# Altium PCB Mainboard.PcbDoc
Units mm, origin at the board's own origin, x right, y up, seen from the top; angles counter-clockwise.
Board outline 14 x 7 mm, 4 copper layers (Top Layer, Layer 1, Layer 2, Bottom Layer), stack 1.082 mm thick; 22 components, 17 nets, 92 pads, 21 vias.
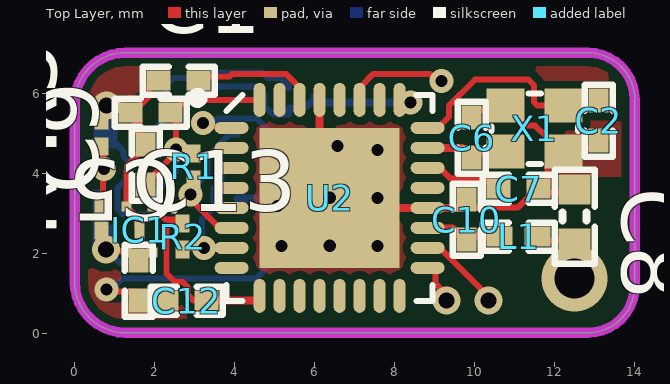
[diagram p0: Top Layer view]
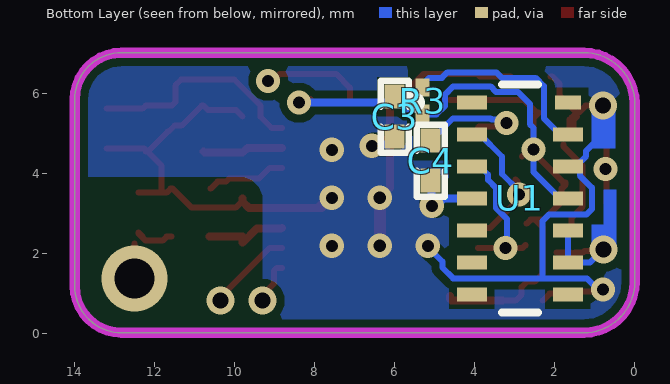
[diagram p1: Bottom Layer view, seen from below]
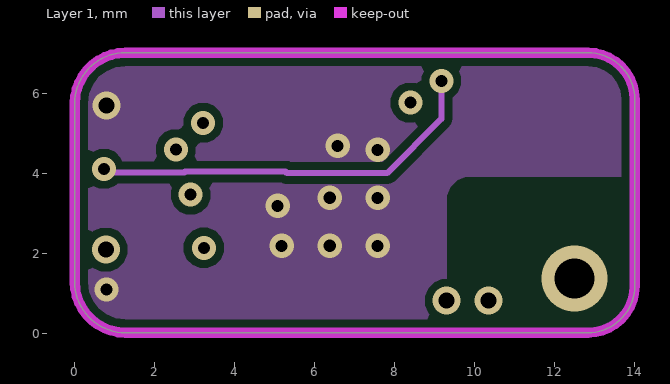
[diagram p2: Layer 1]
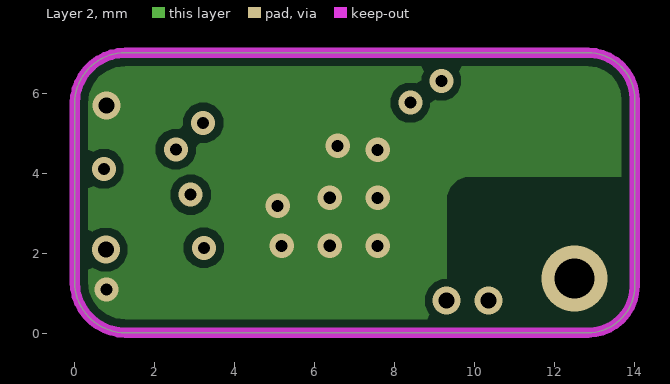
[diagram p3: Layer 2]
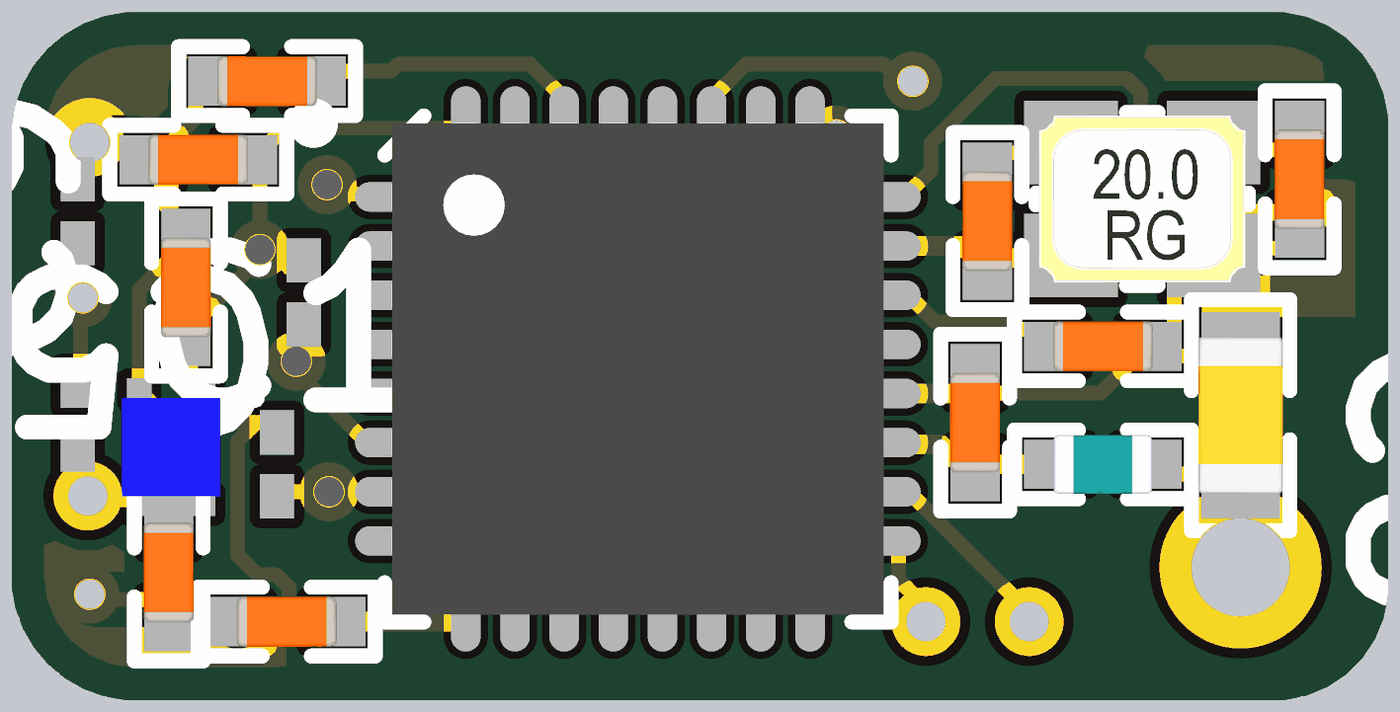
[diagram p4: 3D render of the assembled board from above, using the file's embedded part models]
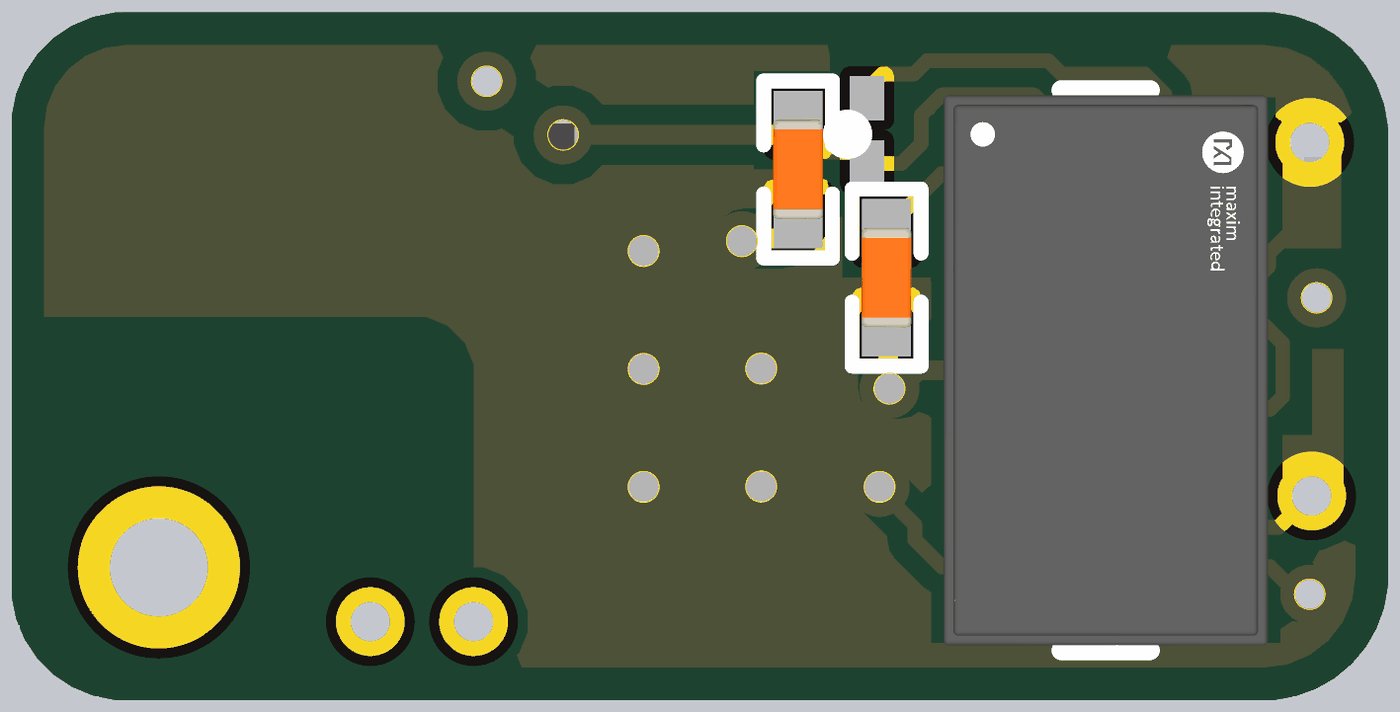
[diagram p5: 3D render of the assembled board from below, using the file's embedded part models]

## Layer stack, top to bottom
Top Solder: solder mask 0.0102, Solder Resist, Dk 3.5
Top Layer: signal copper 0.035
Dielectric 2: prepreg 0.0711, PP-006, Dk 4.1
Layer 1: signal copper 0.035
Dielectric 1: dielectric 0.8, FR-4, Dk 4.8
Layer 2: signal copper 0.035
Dielectric 3: prepreg 0.0711, PP-006, Dk 4.1
Bottom Layer: signal copper 0.035
Bottom Solder: solder mask 0.0102, Solder Resist, Dk 3.5

## Board outline
1.27,0.007 cw(c1.27,1.277) 0,1.277 0,5.737 cw(c1.27,5.737) 1.27,7.007 12.83,7.007 cw(c12.83,5.837) 14,5.837 14,1.177 cw(c12.83,1.177) 12.83,0.007

## Design rules (kind name [scope] priority, off if disabled: settings)
Clearance [All] p1: gap=0.2 ignorepadtopadclearanceinfootprint=FALSE except(0.127: SMDPad-SMDPad; 0.15: Arc-SMDPad Track-SMDPad; 0.33: Arc-THPad Track-THPad; 0.5: THPad-THPad Via-Hole)
ComponentClearance [All] p1: gap=0.254 collisioncheckmode=3 verticalgap=0 showdistances=FALSE
HoleSize [All] p1: absolutevalues=TRUE maxlimit=2.54 minlimit=0.25 maxpercent=80.000 minpercent=20.000
HoleToHoleClearance [All] p1: gap=0.5 allowstackedmicrovias=TRUE
MinimumAnnularRing [All] p1 off: minimumring=0.254
MinimumSolderMaskSliver [All] p1 off: minsoldermaskwidth=0.254
NetAntennae [All] p1: netantennaetolerance=10
PolygonConnect [All] p1: connectstyle=Direct reliefconductorwidth=0.254 reliefentries=4 polygonreliefangle="90 Angle" airgapwidth=0.254
RoutingVias [All] p1: holewidth=0.3 width=0.6 viastyle="Through Hole" minholewidth=0.2 minwidth=0.45 maxholewidth=1 maxwidth=2
SilkToSilkClearance [All] p1 off: silktosilkclearance=0.254
SilkToSolderMaskClearance [IsPad] p1 off: minsilkscreentomaskgap=0.15 clearancetoexposedcopper=TRUE
SolderMaskExpansion [All] p1: expansion=0.102 istentingtop=FALSE
UnRoutedNet [All] p1: checkbadconnections=TRUE
Width [All] p1: maxlimit=2 minlimit=0.15 preferedwidth=0.3
22 further rules are at their usual default settings.

## Components (designator, comment, footprint, x,y, rotation, side; value= is the part's Value field where it differs from the comment)
C1 "1.0µF" CAPC1005X04L 2.6,6.307 r0 top
C2 "12pF" CAPC1005X04L 13.1,5.307 r270 top
C3 "100nF" CAPC1005X04L 6,5.407 r270 bottom
C4 "100nF" CAPC1005X04L 5.1,4.307 r270 bottom
C5 "4.7µF" CAPC1005X04L 1.9,5.507 r180 top
C6 "12pF" CAPC1005X04L 9.925,4.882 r90 top
C7 "100pF" CAPC1005X04L 11.1,3.607 r0 top
C8 "tuning" CAPC1608X06L 12.5,2.907 r270 top
C9 "10µF" CAPC1005X04L 1.775,4.207 r90 top
C10 "0.8pF" CAPC1005X04L 9.8,2.832 r270 top
C12 "100nF" CAPC1005X04L 2.8,0.807 r180 top
C13 "10µF" CAPC1005X04L 1.6,1.307 r90 top
IC1 "TCR3UM18A,LF" TCR3UM18ALF 1.625,2.582 r270 top
L1 "3.9nH" INDC1005X04L 11.1,2.407 r0 top
R1 "4.7k" RESC0603X28X15NL05T05 2.975,4.157 r270 top
R2 "4.7k" RESC0603X28X15NL05T05 2.7,2.407 r90 top
R3 "4.7k" RESC0603X28X15NL05T05 5.3,5.807 r270 bottom
R4 "140k" RESC0603X28X15NL05T05 0.675,2.882 r90 top
R5 "100k" RESC0603X28X15NL05T05 0.675,4.982 r90 top
U1 "MAX30101EFD+" FP-F143A5-1-MFG 2.872,3.365 r180 bottom
U2 "nRF52810-QCAA" Nordic_QFN50P500X500X90-33N 6.371,3.378 r0 top
X1 "32MHz" BT-XTAL_2016 11.5,5.107 r0 top

## Footprints (in the part's own frame and the unit in brackets; to place one, negate y for a bottom-side part, rotate by r counter-clockwise, add the part's x,y. Pads: shape width x height; smd on the part's side, far side on the other; paste and mask are expansions set on the pad)
BT-XTAL_2016 [mm]
  rect 0.95x0.85 smd: 1(-0.725,-0.575) 2(0.725,-0.575) 3(0.725,0.575) 4(-0.725,0.575)
  silkscreen extent -1.08,-0.88 1.08,0.88, body extent -1.05,-0.85 1.05,0.85, height 0.56
CAPC1005X04L [mm]
  rect 0.6x0.5 smd: 1(-0.5,0) 2(0.5,0)
  silkscreen extent -0.9,-0.35 0.9,0.35, body extent -0.51,-0.25 0.51,0.25, height 0.5
CAPC1608X06L [mm]
  rect 0.75x0.8 smd: 1(-0.675,0) 2(0.675,0)
  silkscreen extent -1.17,-0.5 1.17,0.5, body extent -0.8,-0.43 0.8,0.43, height 0.8
FP-F143A5-1-MFG [mm]
  rect 0.75x0.35 smd paste+0 mask+0: 1(-1.2,2.4) 2(-1.2,1.6) 3(-1.2,0.8) 4(-1.2,0) 5(-1.2,-0.8) 6(-1.2,-1.6) 7(-1.2,-2.4) 8(1.2,-2.4) 9(1.2,-1.6) 10(1.2,-0.8) 11(1.2,0) 12(1.2,0.8) 13(1.2,1.6)
  rect 0.65x0.35 smd paste+0 mask+0: 14(1.2,2.4)
  silkscreen extent -2.75,-2.85 0.45,2.85, body extent -1.65,-2.8 1.65,2.8, height 1.65
INDC1005X04L [mm]
  rect 0.65x0.5 smd: 1(-0.475,0) 2(0.475,0)
  silkscreen extent -0.9,-0.35 0.9,0.35, body extent -0.5,-0.3 0.5,0.3, height 0.5
Nordic_QFN50P500X500X90-33N [mm]
  oval 0.85x0.3 smd mask+0.076: 1(-2.45,1.75) 2(-2.45,1.25) 3(-2.45,0.75) 4(-2.45,0.25) 5(-2.45,-0.25) 6(-2.45,-0.75) 7(-2.45,-1.25) 8(-2.45,-1.75) 17(2.45,-1.75) 18(2.45,-1.25) 19(2.45,-0.75) 20(2.45,-0.25) 21(2.45,0.25) 22(2.45,0.75) 23(2.45,1.25) 24(2.45,1.75)
  oval 0.3x0.85 smd mask+0.076: 9(-1.75,-2.45) 10(-1.25,-2.45) 11(-0.75,-2.45) 12(-0.25,-2.45) 13(0.25,-2.45) 14(0.75,-2.45) 15(1.25,-2.45) 16(1.75,-2.45) 25(1.75,2.45) 26(1.25,2.45) 27(0.75,2.45) 28(0.25,2.45) 29(-0.25,2.45) 30(-0.75,2.45) 31(-1.25,2.45) 32(-1.75,2.45)
  rect 3.5x3.5 smd: 33(0,0)
  silkscreen extent -3.42,-2.57 2.57,2.62, body extent -2.5,-2.5 2.5,2.5, height 0.9
RESC0603X28X15NL05T05 [mm] "Chip Resistor, 2-Leads, Body 0.60x0.30mm, IPC Medium Density"
  rect 0.45x0.35 smd: 1(-0.325,0) 2(0.325,0)
  body extent -0.33,-0.17 0.33,0.18, height 0.28
TCR3UM18ALF [mm]
  rect 0.25x0.25 smd: 1(-0.575,0.325) 2(-0.575,-0.325) 3(0.575,-0.325) 4(0.575,0.325)
  rect 0.45x0.25 smd: 5(0,0)
  silkscreen extent -0.55,0.8 -0.45,0.9, body extent -0.5,-0.5 0.5,0.5, height 0.58

## Part data
C1 C9 C13: library part C0603-1µ0, "Capacitor, X7R, ±10%", Footprint Doc=0603, LatestRevisionDate=2013-06-05, Note=16V, Part Number=C0603-1µ0, Pin Count=2, Published=2009-05-08, Publisher="Nordic Semiconductor"
C2 C6: library part C0402-12p, "Capacitor, NP0, ±2%", Footprint Doc=0402, LatestRevisionDate=2011-05-11, Note=50V, Part Number=C0402-12p, Pin Count=2, Published=2009-05-08, Publisher="Nordic Semiconductor"
C3 C4 C12: library part C0402-100n, "Capacitor, X7R, ±10%", Footprint Doc=0402, LatestRevisionDate=2009-11-23, Note=16V, Part Number=C0402-100n, Pin Count=2, Published=2009-05-08, Publisher="Nordic Semiconductor"
C5: library part C0603-4µ7, "Capacitor, X5R, ±10%", Footprint Doc=0603, LatestRevisionDate=2009-11-23, Note=6.3V, Part Number=C0603-4µ7, Pin Count=2, Published=2009-05-08, Publisher="Nordic Semiconductor"
C7: library part C0402-100p, "Capacitor, NP0, ±5%", Footprint Doc=0402, LatestRevisionDate=2009-05-08, Note=50V, Part Number=C0402-100p, Pin Count=2, Published=2009-05-08, Publisher="Nordic Semiconductor"
C8 C10: library part C0402-0.8p, "Capacitor, NP0, ±5%", Footprint Doc=0402, LatestRevisionDate=2012-11-21, Note=50V, Part Number=C0402-0.8p, Pin Count=2, Published=2009-05-08, Publisher="Nordic Semiconductor"
IC1: "Integrated Circuit", Manufacturer_Name=Toshiba, Mouser Part Number=757-TCR3UM18ALF, Arrow Part Number=TCR3UM18A,LF, Arrow Price/Stock=https://www.arrow.com/en/products/tcr3um18alf/toshiba, Datasheet Link=https://toshiba.semicon-storage.com/info/docget.jsp?did=63293&prodName=TCR3UM18A, Manufacturer_Part_Number=TCR3UM18A,LF, Mouser Price/Stock=https://www.mouser.co.uk/ProductDetail/Toshiba/TCR3UM18ALF/?qs=byeeYqUIh0P0oLl%2FDXjLWg%3D%3D
L1: library part L0402-3n9, "High frequency chip inductor ±5%", Footprint Doc=0402, LatestRevisionDate=2012-09-19, Part Number=L0402-3n9, Pin Count=2, Published=2009-05-08, Publisher="Nordic Semiconductor"
R1 R2 R3 R4 R5: library part CMP-2004-00673-1, Manufacturer="Vishay Dale", Part Number=CRCW02014K70JNED
U1: library part CMP-05738-000001-1, "INTEGRATED OPTICAL SENSOR", Manufacturer="Maxim Integrated", Max Junction Temp=+90°C, Max Supply Voltage=2V, Min Supply Voltage=1.7V, Operating Supply Current=600uA, Package=F143A5-1, Temperature="-40°C to +85°C", Temperature Range High=+85°C, Temperature Range Low=-40°C, Automotive=No, Category=IC, ComponentLink2Description=Datasheet, ComponentLink2URL=https://datasheets.maximintegrated.com/en/ds/MAX30101.pdf, Device Class L1=Sensors, Device Class L2=unset, Device Class L3=unset, Digikey Description="INTEGRATED OPTICAL SENSOR", Footprint Url=https://pdfserv.maximintegrated.com/land_patterns/90-0602.PDF, Height=1.65mm, Lead Free=Yes, Manufacturer Part Number=MAX30101EFD+, Mouser Description="INTEGRATED OPTICAL SENSOR", Octopart=https://octopart.com/max30101efd%2B-maxim+integrated-57054333, RoHS=TRUE, Sensor Output=I2C
U2: "Multi-protocol Bluetooth Low Energy, ANT and 2.4GHz proprietary system-on-chip", Manufacturer="Nordic Semiconductor", Footprint Doc=QFN-32, LatestRevisionDate=2017-08-21, Manufacturer Part Number=nRF52810-QCAA, Note="nRF52810 - QFN32 5x5 0.5mm pitch", Part Number=nRF52810-QCAA, Pin Count=32, Published=2017-08-21, Publisher="Nordic Semiconductor"
X1: library part XTAL_SMD2016_32MHz_8pF_General, "XTAL SMD 2016, 32MHz, Cl=8pF, Total Tol: ±40ppm", Footprint Doc=XTAL_2016, LatestRevisionDate=2016-08-19, Part Number=XTAL_SMD2016_32MHz_8pF_General, Pin Count=4, Published=2016-08-19, Publisher="Nordic Semiconductor"

## Via types
v1: diameter 0.61, hole 0.305, Top Layer to Bottom Layer, tented both sides, 8 vias
v2: diameter 0.6, hole 0.3, Top Layer to Bottom Layer, tented both sides, 8 vias
v3: diameter 0.7, hole 0.4, Top Layer to Bottom Layer, 4 vias
v4: diameter 1.65, hole 1, Top Layer to Bottom Layer, 1 vias

## Nets (pads, with @x,y where several pads share a name; then routed paths per layer and width w, separated by ;. In a path a pad name is that pad's centre, name@x,y a point inside that pad or via, vN(x,y) a via of type N, cw(c..) or ccw(c..) an arc to the next point about the centre after c; other vN are vias at no path point)
+1V8: C3.1 C5.1 C9.1 C12.1 IC1.1 R1.1 R2.2 R3.2 U1.11 U2.9 U2.25 U2.32 | length 20.7
  Top Layer w0.15: C9.1@1.725,3.757 1.725,3.707 1.825,3.607 1.825,3.282 IC1.1 2.275,2.832 2.488,2.832 ; C9.1 1.775,3.757 2.528,4.51 v2(2.528,4.592) ; R2.2 2.6,2.832 2.488,2.832 ; R1.1@2.824,4.407 2.638,4.592 v2(2.528,4.592) ; C12.1 2.975,0.807 2.825,0.957 2.825,1.15 2.694,1.282 2.5,1.282 2.3,1.482 2.3,1.864 2.3,2.645 2.488,2.832 ; U2.32 2.771,5.828 2.45,5.507 C5.1 2.528,5.38 v2(2.528,4.592)
  Top Layer w0.2: C12.1 4.575,0.807 4.621,0.853 U2.9 ; U2.25 8.156,5.794 8.355,5.794 v2(8.39,5.759)
  Bottom Layer w0.15: U1.11 1.872,3.365 2.528,4.021 v2(2.528,4.592) 2.528,5.126 2.622,5.22 2.622,5.729 2.922,6.029 3.472,6.029 3.472,6.033 3.604,6.165 4.541,6.165 4.672,6.033 4.672,6.029 4.677,6.029 4.748,5.958 4.748,5.674 4.955,5.466 R3.2@5.355,5.466
  Bottom Layer w0.2: R3.2 5.3,5.532 5.375,5.607 5.7,5.607 5.8,5.707 5.85,5.707 6,5.857 C3.1@6,5.892 ; C3.1 C3.1@6,5.892 ; v2(8.39,5.759) 6.134,5.759 C3.1@6,5.892
BATT+: C13.2 IC1.3 IC1.4 R4.1 U1.9 U1.10 | length 4
  Top Layer w0.15: R4.1 0.726,2.506 0.726,2.136 v3(0.777,2.085) 0.816,2.046 1.261,2.046 IC1.3 1.488,2.007 1.544,1.951 1.6,2.007 IC1.4
  Bottom Layer w0.15: 0.775,2.482 0.777,2.48 v3(0.777,2.085) ; v3@0.777,2.038 v3(0.777,2.085) ; U1.10 U1.9 1.117,1.765 0.797,2.085 v3(0.777,2.085)
DEC1: C4.1 U2.1 | length 2.6
  Top Layer w0.15: v2(3.21,5.253) 3.296,5.167 3.469,5.167 3.479,5.157 3.893,5.157 U2.1
  Bottom Layer w0.15: v2(3.21,5.253) 3.296,5.339 3.578,5.339 3.604,5.365 4.541,5.365 4.542,5.365 C4.1@4.9,5.007
DEC3: C7.1 U2.22 | length 2
  Top Layer w0.15: U2.22 9.127,4.128 9.398,3.857 10.144,3.857 10.219,3.782 10.425,3.782 C7.1
DEC4: C1.2 U2.30 | length 3
  Top Layer w0.15: C1.2@3.1,6.407 3.866,6.407 3.937,6.478 5.277,6.478 5.621,6.134 U2.30
GND: C1.1 C2.2 C3.2 C4.2 C5.2 C6.2 C7.2 C8.1 C9.2 C10.1 C12.2 C13.1 IC1.2 IC1.5 R5.2 U1.4 U1.12 U2.20 U2.29 U2.33 X1.2 X1.4 | length 35.4
  Top Layer w0.15: R5.2 0.736,5.368 0.736,5.621 v3(0.797,5.682) 1.225,5.682 C5.2 ; v2(0.797,1.085) 0.851,1.032 1.55,1.032 1.6,0.982 2.125,0.982 C12.2 ; C5.2@1.447,5.411 1.525,5.332 1.525,5.082 1.625,4.982 1.625,5.332 1.575,5.382 1.497,5.461 1.45,5.507 1.875,5.932 1.875,6.232 2.05,6.407 C1.1@2.1,6.407 ; IC1.5 1.575,2.632 1.575,2.882 IC1.2 1.3,3.63 1.3,4.054 1.302,4.056 1.302,4.184 1.775,4.657 C9.2 ; C10.1@9.8,3.282 C10.1@9.8,3.307 ; C10.1 C10.1@9.8,3.307 ; C6.2@9.8,5.407 9.974,5.581 10.674,5.581 X1.4 10.825,5.682 11.325,5.182 11.507,5.182 11.657,5.032 11.675,5.032 X1.2@12.175,4.532 ; X1.2@12.2,4.557 12.25,4.607 C2.2@13.2,4.607 ; X1.2 X1.2@12.175,4.532 ; C8.1@12.4,3.507 C7.2@11.825,3.507 ; C10.1@9.8,3.307 9.975,3.132 11.075,3.132 11.55,3.607 C7.2 11.7,3.507 C7.2@11.825,3.507 ; C7.2@11.825,3.507 11.825,4.132 11.825,4.182 X1.2@12.175,4.532
  Top Layer w0.2: U2.33@6.121,3.628 U2.29 ; U2.33@6.211,4.848 U2.33@6.461,4.598 ; v1(7.571,3.378) 7.821,3.128 U2.20 9.646,3.128 C10.1@9.8,3.282 ; U2.33@7.661,3.398 U2.33@7.911,3.148 ; C10.1 C10.1@9.8,3.357
  Top Layer w0.3: U2.33@6.25,2.207 6.371,2.328 U2.33 U2.33@6.425,3.432
  Bottom Layer w0.15: v2(0.797,1.085) 0.919,1.085 1.199,1.365 2.3,1.365 ; v3(0.797,5.682) 0.797,4.972 1.217,4.552 1.217,4.421 1.472,4.165 1.372,4.065 1.372,3.933 1.072,3.633 1.072,3.097 1.204,2.965 1.6,2.965 2.141,2.965 2.3,2.805 2.3,1.365 ; 2.488,1.365 2.3,1.365 ; 2.511,1.365 4.541,1.365 4.812,1.637 4.812,1.788 5.171,2.148 v1(5.171,2.178)
  Bottom Layer w0.2: U1.4 4.774,3.365 4.961,3.178 v1(5.071,3.178) 5.086,3.193 5.086,3.793 C4.2 ; C3.2 6,4.857 6.15,4.707 6.542,4.707 v1(6.571,4.678)
  other v1: 6.375,2.182 7.571,2.178 6.375,3.382 7.571,4.578
NetC10_2: C10.2 L1.1 U2.19 | length 2
  Top Layer w0.2: U2.19 8.841,2.609 9.449,2.609 C10.2@9.8,2.257 ; C10.2 9.875,2.407 L1.1
NetR3_1: R3.1 U1.13 | length 5
  Bottom Layer w0.15: U1.13 1.872,4.965 2.272,5.365 2.272,6.174 2.477,6.379 3.323,6.379 3.459,6.515 4.686,6.515 4.822,6.379 5.142,6.379 5.355,6.166 R3.1@5.355,6.116
P0.28/AIN4: R4.2 R5.1 U2.27 | length 14
  Top Layer w0.15: R4.2 0.701,3.233 0.701,4.076 v2(0.727,4.102) ; R5.1 0.701,4.631 v2@0.701,4.108 ; U2.27 7.121,6.134 7.466,6.478 8.872,6.478 9.045,6.305 v2(9.167,6.305)
  Layer 1 w0.15: v2(0.727,4.102) 0.812,4.017 2.745,4.017 2.759,4.032 5.269,4.032 5.302,3.998 7.812,3.998 9.167,5.354 v2(9.167,6.305)
P0.30/AIN6: U2.28
RF: C8.2 L1.2 | length 2.1
  Top Layer w0.15: L1.2 11.7,2.407 11.8,2.307 12.225,2.307 12.4,2.482 12.4,2.507 C8.2@12.3,2.407 ; v4@12.5,1.259 C8.2
  other v4: 12.5,1.359
SCL: R1.2 U1.2 U2.6 | length 4
  Top Layer w0.15: R1.2 2.936,3.793 2.936,3.496 v2(2.897,3.457) 2.897,3.347 3.616,2.628 U2.6
  Bottom Layer w0.15: v2(2.897,3.457) 2.897,3.553 3.319,3.975 3.319,4.412 3.872,4.965 U1.2
SDA: R2.1 U1.3 U2.7 | length 3.8
  Top Layer w0.15: R2.1@2.736,2.196 2.736,2.192 2.8,2.128 U2.7
  Bottom Layer w0.15: v2(3.23,2.128) 3.188,2.171 3.188,2.844 3.472,3.129 3.472,3.633 3.669,3.83 3.669,3.962 3.872,4.165 U1.3
SWDCLK: U2.17 | length 1.1
  Top Layer w0.15: U2.17 8.952,1.628 9.021,1.559 9.021,1.235 9.3,0.956 v3(9.3,0.807)
SWDIO: U2.18 | length 2.1
  Top Layer w0.15: U2.18 9.127,2.128 10.35,0.904 v3(10.35,0.807)
XC1: C6.1 U2.23 X1.1 | length 2
  Top Layer w0.2: U2.23 9.679,4.628 9.8,4.507 10.75,4.507 X1.1
XC2: C2.1 U2.24 X1.3 | length 5.6
  Top Layer w0.15: U2.24 9.081,5.128 9.354,5.401 9.354,5.679 10.007,6.332 11.344,6.332 11.483,6.193 11.483,5.77 11.57,5.682 X1.3 12.3,5.607 C2.1@13.2,5.607
pads on no net: U1.1 U1.5 U1.6 U1.7 U1.8 U1.14 U2.2 U2.3 U2.4 U2.5 U2.8 U2.10 U2.11 U2.12 U2.13 U2.14 U2.15 U2.16 U2.21 U2.26 U2.31

## Polygon pours and split planes (outlines as drawn)
GND on Bottom Layer "GND_L04_P001" (solid, pour order 1): 0.1,0.107 0.1,6.907 13.9,6.907 13.9,0.007
GND on Top Layer "GND_L01_P002" (solid, pour order 2): 0.1,0.107 0.1,6.907 13.9,6.907 13.9,0.007
GND on Layer 1 "GND_L02_P003" (solid, pour order 3): 0.1,0.107 0.1,6.907 13.9,6.907 13.9,0.007
GND on Layer 2 "GND_L03_P004" (solid, pour order 4): 0.1,0.107 0.1,6.907 13.9,6.907 13.9,0.007

## Keep-outs
Keep-Out Layer:
  lines w0.254: 0,1.277 ccw(c1.27,1.277) 1.27,0.007 1.37,0.007 1.6,0.007 12.83,0.007 ccw(c12.83,1.177) 14,1.177 14,5.837 ccw(c12.83,5.837) 12.83,7.007 1.37,7.007 1.27,7.007 ccw(c1.27,5.737) 0,5.737 0,1.277

## Other copper
Top Layer:
  pour cut-out: 9.3,0.107 9.3,3.307 cw(c9.9,3.307) 9.9,3.907 13.9,3.907 13.9,0.007
Layer 1:
  pour cut-out: 9.3,0.107 9.3,3.307 cw(c9.9,3.307) 9.9,3.907 13.9,3.907 13.9,0.007
Layer 2:
  pour cut-out: 9.3,0.107 9.3,3.307 cw(c9.9,3.307) 9.9,3.907 13.9,3.907 13.9,0.007
Bottom Layer:
  rectangle net BATT+: 0.45,2.482 0.775,2.907
  rectangle net BATT+: 0.45,2.707 0.775,3.582
  rectangle net BATT+: 0.45,2.082 1.075,2.707
  rectangle net GND: 0.475,4.607 1.075,5.682
  pour cut-out: 9.3,0.107 9.3,3.307 cw(c9.9,3.307) 9.9,3.907 13.9,3.907 13.9,0.007